# EAGLE board avoccado-nora2-panel (EAGLE 7.2.0), part 1 of 4
Avoccado-avr-yolandi Yolandi is the minified version of Avoccado-avr with less pins broken out and a footprint of less than one square inch for the PCB without peripherals.
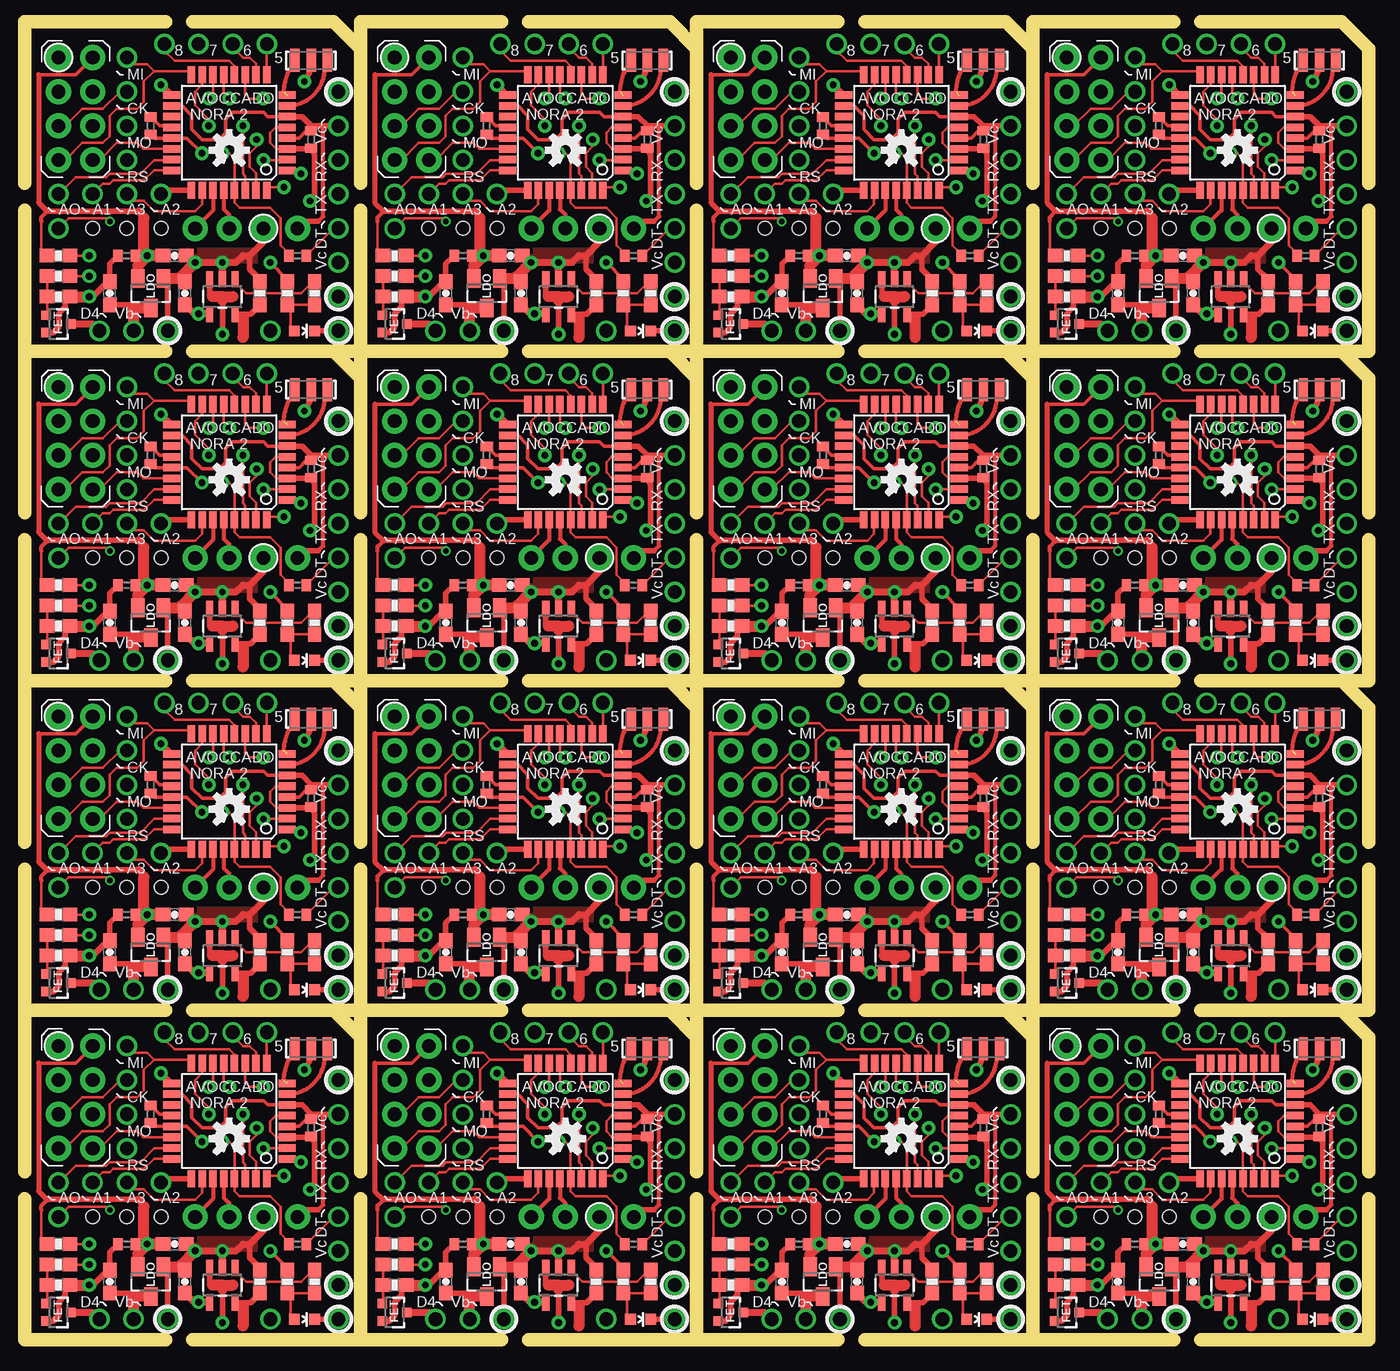
[diagram p0: board, top side]
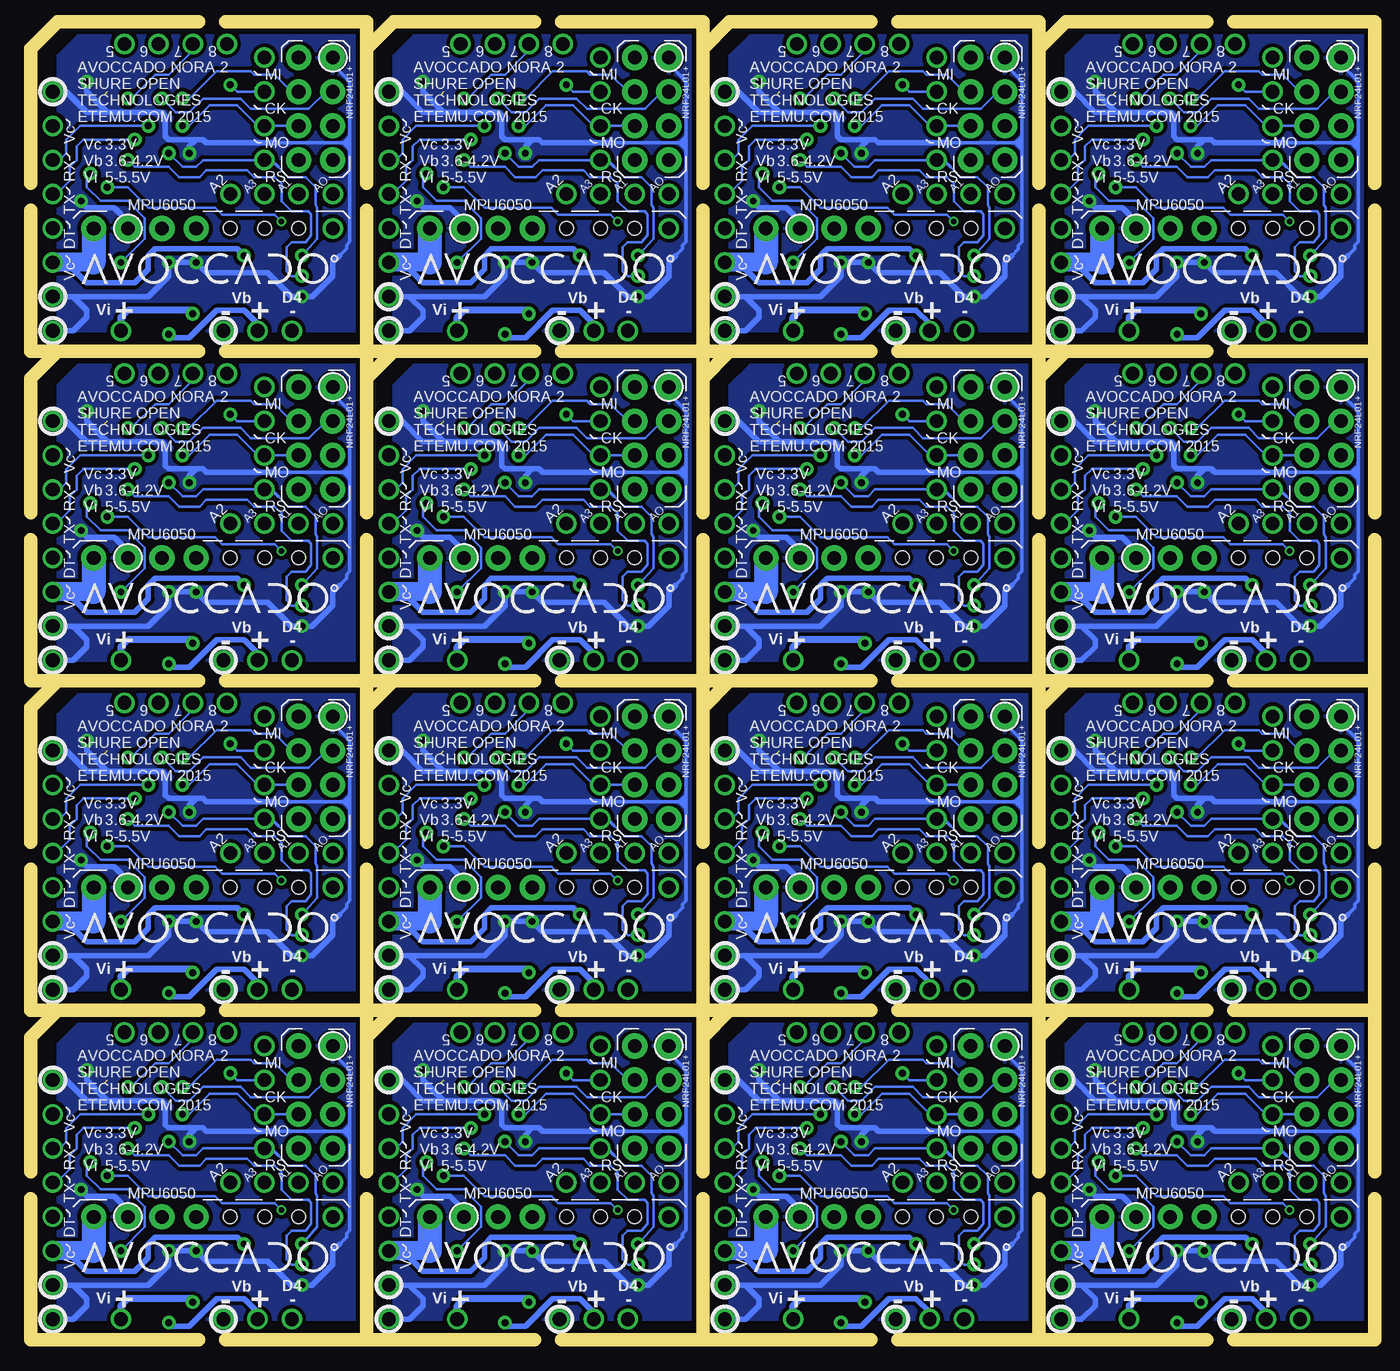
[diagram p1: board, bottom side, seen from below]

No outline drawn. Coordinates in mm, seen from the top.
Copper layers (1*16): Top 0.035mm / dielectric 1.5mm / Bottom 0.035mm
Design rules "dirt_cheap_dirty_boards.v1 *": minimum track width 5mil, minimum drill 12mil, track to track 5mil, track to pad 5mil, pad to pad 5mil, via to via 5mil, smd to smd 0mil, copper to edge 10mil, drill to drill 10mil, minimum pad ring 10mil, minimum via ring 6mil, stop-mask expansion 0mil, vias tented up to drill 25mil, thermal gap 10mil
Net classes: 1 vcc: width 0.254 mm; 3 usbvcc: width 0.203 mm, drill 0.61 mm, clearance 0.152 mm
Holes 1.02 mm at 4.57,8.64 7.11,8.64 9.65,8.64 29.57,8.64 32.11,8.64 34.65,8.64 4.57,33.14 7.11,33.14 9.65,33.14 29.57,33.14 32.11,33.14 34.65,33.14 54.57,8.64 57.11,8.64 59.65,8.64 79.57,8.64 82.11,8.64 84.65,8.64 54.57,33.14 57.11,33.14 59.65,33.14 79.57,33.14 82.11,33.14 84.65,33.14 4.57,57.64 7.11,57.64 9.65,57.64 29.57,57.64 32.11,57.64 34.65,57.64 4.57,82.14 7.11,82.14 9.65,82.14 29.57,82.14 32.11,82.14 34.65,82.14 54.57,57.64 57.11,57.64 59.65,57.64 79.57,57.64 82.11,57.64 84.65,57.64 54.57,82.14 57.11,82.14 59.65,82.14 79.57,82.14 82.11,82.14 84.65,82.14
Milling: 144 lines

## Footprints (pad centres in the part's own frame; a part is rotated, then mirrored left to right if it is on the bottom)
TQFP32-08 = smd 1.27 x 0.559: 1 -4.293,2.8; 2 -4.293,2; 3 -4.293,1.2; 4 -4.293,0.4; 5 -4.293,-0.4; 6 -4.293,-1.2; 7 -4.293,-2; 8 -4.293,-2.8; 17 4.293,-2.8; 18 4.293,-2; 19 4.293,-1.2; 20 4.293,-0.4; 21 4.293,0.4; 22 4.293,1.2; 23 4.293,2; 24 4.293,2.8 | smd 0.559 x 1.27: 9 -2.8,-4.293; 10 -2,-4.293; 11 -1.2,-4.293; 12 -0.4,-4.293; 13 0.4,-4.293; 14 1.2,-4.293; 15 2,-4.293; 16 2.8,-4.293; 25 2.8,4.293; 26 2,4.293; 27 1.2,4.293; 28 0.4,4.293; 29 -0.4,4.293; 30 -1.2,4.293; 31 -2,4.293; 32 -2.8,4.293
C0402 = smd 0.7 x 0.9: 1 -0.65,0; 2 0.65,0
0603-CAP = smd 1.1 x 1: 1 -0.85,0; 2 0.85,0
LED-0603 = smd 0.8 x 0.8: A 0,-0.75; C 0,0.75
1X01NS-KIT = drill 1.016 pad 1.524: 1 0,0
1X02_NO_SILK = drill 1.016 pad 1.88: 1 0,0; 2 2.54,0
SOT23 = smd 1 x 1.4: 1 -0.95,-1.1; 2 0.95,-1.1; 3 0,1.1
RESONATOR-SMD = smd 0.7 x 1.7: 1 -1.2,0; 2 0,0; 3 1.2,0
SOT323 = smd 0.7 x 0.7: 1 -0.65,-0.925; 2 0.65,-0.925; 3 0,0.925
0603-RES = smd 1.1 x 1: 1 -0.85,0; 2 0.85,0
SOT23-5 = smd 0.55 x 1.2: 1 -0.95,-1.3; 2 0,-1.3; 3 0.95,-1.3; 4 0.95,1.3; 5 -0.95,1.3

## Placement (x,y rotation side)
AVR  ATMEGA328P  [TQFP32-08]  14.73,15.76 180 top
AVR1  ATMEGA328P  [TQFP32-08]  39.73,15.76 180 top
AVR2  ATMEGA328P  [TQFP32-08]  14.73,40.26 180 top
AVR3  ATMEGA328P  [TQFP32-08]  39.73,40.26 180 top
AVR4  ATMEGA328P  [TQFP32-08]  64.73,15.76 180 top
AVR5  ATMEGA328P  [TQFP32-08]  89.73,15.76 180 top
AVR6  ATMEGA328P  [TQFP32-08]  64.73,40.26 180 top
AVR7  ATMEGA328P  [TQFP32-08]  89.73,40.26 180 top
AVR8  ATMEGA328P  [TQFP32-08]  14.73,64.76 180 top
AVR9  ATMEGA328P  [TQFP32-08]  39.73,64.76 180 top
AVR10  ATMEGA328P  [TQFP32-08]  14.73,89.26 180 top
AVR11  ATMEGA328P  [TQFP32-08]  39.73,89.26 180 top
AVR12  ATMEGA328P  [TQFP32-08]  64.73,64.76 180 top
AVR13  ATMEGA328P  [TQFP32-08]  89.73,64.76 180 top
AVR14  ATMEGA328P  [TQFP32-08]  64.73,89.26 180 top
AVR15  ATMEGA328P  [TQFP32-08]  89.73,89.26 180 top
C1  0.1uF  [C0402]  8.89,16.26 90 top
C2  0.1uF  [C0402]  19.81,6.61 0 top
C3  0.1uF  [C0402]  20.83,15.25 90 top
C4  4.7uF  [0603-CAP]  11.43,3.82 90 top
C5  4.7uF  [0603-CAP]  5.84,3.82 90 top
C6  4.7uF  [0603-CAP]  10.67,6.61 0 top
C7  0.1uF  [C0402]  32.11,6.61 180 top
C8  0.1uF  [C0402]  45.83,15.25 90 top
C9  0.1uF  [C0402]  33.89,16.26 90 top
C10  0.1uF  [C0402]  7.11,6.61 180 top
C11  4.7uF  [0603-CAP]  36.43,3.82 90 top
C12  0.1uF  [C0402]  44.81,6.61 0 top
C13  4.7uF  [0603-CAP]  30.84,3.82 90 top
C14  4.7uF  [0603-CAP]  35.67,6.61 0 top
C15  0.1uF  [C0402]  7.11,31.11 180 top
C16  0.1uF  [C0402]  20.83,39.75 90 top
C17  0.1uF  [C0402]  8.89,40.76 90 top
C18  4.7uF  [0603-CAP]  11.43,28.32 90 top
C19  0.1uF  [C0402]  19.81,31.11 0 top
C20  4.7uF  [0603-CAP]  5.84,28.32 90 top
C21  4.7uF  [0603-CAP]  10.67,31.11 0 top
C22  0.1uF  [C0402]  32.11,31.11 180 top
C23  0.1uF  [C0402]  45.83,39.75 90 top
C24  0.1uF  [C0402]  33.89,40.76 90 top
C25  4.7uF  [0603-CAP]  36.43,28.32 90 top
C26  0.1uF  [C0402]  44.81,31.11 0 top
C27  4.7uF  [0603-CAP]  30.84,28.32 90 top
C28  4.7uF  [0603-CAP]  35.67,31.11 0 top
C29  0.1uF  [C0402]  57.11,6.61 180 top
C30  0.1uF  [C0402]  70.83,15.25 90 top
C31  0.1uF  [C0402]  58.89,16.26 90 top
C32  4.7uF  [0603-CAP]  61.43,3.82 90 top
C33  0.1uF  [C0402]  69.81,6.61 0 top
C34  4.7uF  [0603-CAP]  55.84,3.82 90 top
C35  4.7uF  [0603-CAP]  60.67,6.61 0 top
C36  0.1uF  [C0402]  82.11,6.61 180 top
C37  0.1uF  [C0402]  95.83,15.25 90 top
C38  0.1uF  [C0402]  83.89,16.26 90 top
C39  4.7uF  [0603-CAP]  86.43,3.82 90 top
C40  0.1uF  [C0402]  94.81,6.61 0 top
C41  4.7uF  [0603-CAP]  80.84,3.82 90 top
C42  4.7uF  [0603-CAP]  85.67,6.61 0 top
C43  0.1uF  [C0402]  57.11,31.11 180 top
C44  0.1uF  [C0402]  70.83,39.75 90 top
C45  0.1uF  [C0402]  58.89,40.76 90 top
C46  4.7uF  [0603-CAP]  61.43,28.32 90 top
C47  0.1uF  [C0402]  69.81,31.11 0 top
C48  4.7uF  [0603-CAP]  55.84,28.32 90 top
C49  4.7uF  [0603-CAP]  60.67,31.11 0 top
C50  0.1uF  [C0402]  82.11,31.11 180 top
C51  0.1uF  [C0402]  95.83,39.75 90 top
C52  0.1uF  [C0402]  83.89,40.76 90 top
C53  4.7uF  [0603-CAP]  86.43,28.32 90 top
C54  0.1uF  [C0402]  94.81,31.11 0 top
C55  4.7uF  [0603-CAP]  80.84,28.32 90 top
C56  4.7uF  [0603-CAP]  85.67,31.11 0 top
C57  0.1uF  [C0402]  7.11,55.61 180 top
C58  0.1uF  [C0402]  20.83,64.25 90 top
C59  0.1uF  [C0402]  8.89,65.26 90 top
C60  4.7uF  [0603-CAP]  11.43,52.82 90 top
C61  0.1uF  [C0402]  19.81,55.61 0 top
C62  4.7uF  [0603-CAP]  5.84,52.82 90 top
C63  4.7uF  [0603-CAP]  10.67,55.61 0 top
C64  0.1uF  [C0402]  32.11,55.61 180 top
C65  0.1uF  [C0402]  45.83,64.25 90 top
C66  0.1uF  [C0402]  33.89,65.26 90 top
C67  4.7uF  [0603-CAP]  36.43,52.82 90 top
C68  0.1uF  [C0402]  44.81,55.61 0 top
C69  4.7uF  [0603-CAP]  30.84,52.82 90 top
C70  4.7uF  [0603-CAP]  35.67,55.61 0 top
C71  0.1uF  [C0402]  7.11,80.11 180 top
C72  0.1uF  [C0402]  20.83,88.75 90 top
C73  0.1uF  [C0402]  8.89,89.76 90 top
C74  4.7uF  [0603-CAP]  11.43,77.32 90 top
C75  0.1uF  [C0402]  19.81,80.11 0 top
C76  4.7uF  [0603-CAP]  5.84,77.32 90 top
C77  4.7uF  [0603-CAP]  10.67,80.11 0 top
C78  0.1uF  [C0402]  32.11,80.11 180 top
C79  0.1uF  [C0402]  45.83,88.75 90 top
C80  0.1uF  [C0402]  33.89,89.76 90 top
C81  4.7uF  [0603-CAP]  36.43,77.32 90 top
C82  0.1uF  [C0402]  44.81,80.11 0 top
C83  4.7uF  [0603-CAP]  30.84,77.32 90 top
C84  4.7uF  [0603-CAP]  35.67,80.11 0 top
C85  0.1uF  [C0402]  57.11,55.61 180 top
C86  0.1uF  [C0402]  70.83,64.25 90 top
C87  0.1uF  [C0402]  58.89,65.26 90 top
C88  4.7uF  [0603-CAP]  61.43,52.82 90 top
C89  0.1uF  [C0402]  69.81,55.61 0 top
C90  4.7uF  [0603-CAP]  55.84,52.82 90 top
C91  4.7uF  [0603-CAP]  60.67,55.61 0 top
C92  0.1uF  [C0402]  82.11,55.61 180 top
C93  0.1uF  [C0402]  95.83,64.25 90 top
C94  0.1uF  [C0402]  83.89,65.26 90 top
C95  4.7uF  [0603-CAP]  86.43,52.82 90 top
C96  0.1uF  [C0402]  94.81,55.61 0 top
C97  4.7uF  [0603-CAP]  80.84,52.82 90 top
C98  4.7uF  [0603-CAP]  85.67,55.61 0 top
C99  0.1uF  [C0402]  57.11,80.11 180 top
C100  0.1uF  [C0402]  70.83,88.75 90 top
C101  0.1uF  [C0402]  58.89,89.76 90 top
C102  4.7uF  [0603-CAP]  61.43,77.32 90 top
C103  0.1uF  [C0402]  69.81,80.11 0 top
C104  4.7uF  [0603-CAP]  55.84,77.32 90 top
C105  4.7uF  [0603-CAP]  60.67,80.11 0 top
C106  0.1uF  [C0402]  82.11,80.11 180 top
C107  0.1uF  [C0402]  95.83,88.75 90 top
C108  0.1uF  [C0402]  83.89,89.76 90 top
C109  4.7uF  [0603-CAP]  86.43,77.32 90 top
C110  0.1uF  [C0402]  94.81,80.11 0 top
C111  4.7uF  [0603-CAP]  80.84,77.32 90 top
C112  4.7uF  [0603-CAP]  85.67,80.11 0 top
D1  LED  [LED-0603]  20.33,1.02 270 top
D2  LED  [LED-0603]  45.33,1.02 270 top
D3  LED  [LED-0603]  20.33,25.52 270 top
D4  LED  [LED-0603]  45.33,25.52 270 top
D5  LED  [LED-0603]  70.33,1.02 270 top
D6  LED  [LED-0603]  95.33,1.02 270 top
D7  LED  [LED-0603]  70.33,25.52 270 top
D8  LED  [LED-0603]  95.33,25.52 270 top
D9  LED  [LED-0603]  20.33,50.02 270 top
D10  LED  [LED-0603]  45.33,50.02 270 top
D11  LED  [LED-0603]  20.33,74.52 270 top
D12  LED  [LED-0603]  45.33,74.52 270 top
D13  LED  [LED-0603]  70.33,50.02 270 top
D14  LED  [LED-0603]  95.33,50.02 270 top
D15  LED  [LED-0603]  70.33,74.52 270 top
D16  LED  [LED-0603]  95.33,74.52 270 top
JP1  M01NOSILK-KIT  [1X01NS-KIT]  47.86,3.56 0 top
JP2  M021X02_NO_SILK  [1X02_NO_SILK]  2.03,21.34 0 top
JP3  M01NOSILK-KIT  [1X01NS-KIT]  22.86,18.8 0 top
JP4  M021X02_NO_SILK  [1X02_NO_SILK]  19.81,8.64 180 top
JP5  M021X02_NO_SILK  [1X02_NO_SILK]  14.73,8.64 180 top
JP6  M01NOSILK-KIT  [1X01NS-KIT]  22.86,3.56 0 top
JP7  M01NOSILK-KIT  [1X01NS-KIT]  47.86,13.72 0 top
JP8  M01NOSILK-KIT  [1X01NS-KIT]  22.86,13.72 0 top
JP9  M01NOSILK-KIT  [1X01NS-KIT]  22.86,11.18 0 top
JP10  M01NOSILK-KIT  [1X01NS-KIT]  22.86,8.64 0 top
JP11  M01NOSILK-KIT  [1X01NS-KIT]  22.86,16.26 0 top
JP12  M01NOSILK-KIT  [1X01NS-KIT]  7.11,21.34 0 top
JP13  M01NOSILK-KIT  [1X01NS-KIT]  7.11,18.8 0 top
JP14  M01NOSILK-KIT  [1X01NS-KIT]  7.11,16.26 0 top
JP15  M01NOSILK-KIT  [1X01NS-KIT]  7.11,13.72 0 top
JP16  M01NOSILK-KIT  [1X01NS-KIT]  47.86,11.18 0 top
JP17  M01NOSILK-KIT  [1X01NS-KIT]  17.78,1.02 0 top
JP18  M01NOSILK-KIT  [1X01NS-KIT]  22.86,6.1 0 top
JP19  M01NOSILK-KIT  [1X01NS-KIT]  2.03,11.18 90 top
JP20  M01NOSILK-KIT  [1X01NS-KIT]  4.57,11.18 90 top
JP21  M01NOSILK-KIT  [1X01NS-KIT]  9.65,11.18 90 top
JP22  M01NOSILK-KIT  [1X01NS-KIT]  7.11,11.18 90 top
JP23  M01NOSILK-KIT  [1X01NS-KIT]  5.08,1.02 0 top
JP24  M01NOSILK-KIT  [1X01NS-KIT]  7.62,1.02 0 top
JP25  M01NOSILK-KIT  [1X01NS-KIT]  10.16,1.02 0 top
JP26  M01NOSILK-KIT  [1X01NS-KIT]  22.86,1.02 0 top
JP27  M021X02_NO_SILK  [1X02_NO_SILK]  2.03,18.8 0 top
JP28  M021X02_NO_SILK  [1X02_NO_SILK]  2.03,16.26 0 top
JP29  M021X02_NO_SILK  [1X02_NO_SILK]  2.03,13.72 0 top
JP30  M01NOSILK-KIT  [1X01NS-KIT]  47.86,8.64 0 top
JP31  M01NOSILK-KIT  [1X01NS-KIT]  47.86,16.26 0 top
JP32  M01NOSILK-KIT  [1X01NS-KIT]  32.11,21.34 0 top
JP33  M01NOSILK-KIT  [1X01NS-KIT]  32.11,18.8 0 top
JP34  M01NOSILK-KIT  [1X01NS-KIT]  32.11,16.26 0 top
JP35  M01NOSILK-KIT  [1X01NS-KIT]  32.11,13.72 0 top
JP36  M01NOSILK-KIT  [1X01NS-KIT]  47.86,18.8 0 top
JP37  M01NOSILK-KIT  [1X01NS-KIT]  42.78,1.02 0 top
JP38  M01NOSILK-KIT  [1X01NS-KIT]  47.86,6.1 0 top
JP39  M01NOSILK-KIT  [1X01NS-KIT]  27.03,11.18 90 top
JP40  M01NOSILK-KIT  [1X01NS-KIT]  29.57,11.18 90 top
JP41  M01NOSILK-KIT  [1X01NS-KIT]  34.65,11.18 90 top
JP42  M01NOSILK-KIT  [1X01NS-KIT]  32.11,11.18 90 top
JP43  M01NOSILK-KIT  [1X01NS-KIT]  32.62,1.02 0 top
JP44  M01NOSILK-KIT  [1X01NS-KIT]  30.08,1.02 0 top
JP45  M01NOSILK-KIT  [1X01NS-KIT]  35.16,1.02 0 top
JP46  M01NOSILK-KIT  [1X01NS-KIT]  47.86,1.02 0 top
JP47  M021X02_NO_SILK  [1X02_NO_SILK]  27.03,21.34 0 top
JP48  M021X02_NO_SILK  [1X02_NO_SILK]  27.03,18.8 0 top
JP49  M021X02_NO_SILK  [1X02_NO_SILK]  27.03,16.26 0 top
JP50  M021X02_NO_SILK  [1X02_NO_SILK]  27.03,13.72 0 top
JP51  M021X02_NO_SILK  [1X02_NO_SILK]  44.81,8.64 180 top
JP52  M021X02_NO_SILK  [1X02_NO_SILK]  39.73,8.64 180 top
JP53  M01NOSILK-KIT  [1X01NS-KIT]  22.86,28.06 0 top
JP54  M01NOSILK-KIT  [1X01NS-KIT]  22.86,38.22 0 top
JP55  M01NOSILK-KIT  [1X01NS-KIT]  22.86,35.68 0 top
JP56  M01NOSILK-KIT  [1X01NS-KIT]  22.86,33.14 0 top
JP57  M01NOSILK-KIT  [1X01NS-KIT]  22.86,40.76 0 top
JP58  M01NOSILK-KIT  [1X01NS-KIT]  7.11,45.84 0 top
JP59  M01NOSILK-KIT  [1X01NS-KIT]  7.11,43.3 0 top
JP60  M01NOSILK-KIT  [1X01NS-KIT]  7.11,40.76 0 top
JP61  M01NOSILK-KIT  [1X01NS-KIT]  7.11,38.22 0 top
JP62  M01NOSILK-KIT  [1X01NS-KIT]  22.86,43.3 0 top
JP63  M01NOSILK-KIT  [1X01NS-KIT]  17.78,25.52 0 top
JP64  M01NOSILK-KIT  [1X01NS-KIT]  22.86,30.6 0 top
JP65  M01NOSILK-KIT  [1X01NS-KIT]  2.03,35.68 90 top
JP66  M01NOSILK-KIT  [1X01NS-KIT]  4.57,35.68 90 top
JP67  M01NOSILK-KIT  [1X01NS-KIT]  9.65,35.68 90 top
JP68  M01NOSILK-KIT  [1X01NS-KIT]  7.11,35.68 90 top
JP69  M01NOSILK-KIT  [1X01NS-KIT]  7.62,25.52 0 top
JP70  M01NOSILK-KIT  [1X01NS-KIT]  5.08,25.52 0 top
JP71  M01NOSILK-KIT  [1X01NS-KIT]  10.16,25.52 0 top
JP72  M01NOSILK-KIT  [1X01NS-KIT]  22.86,25.52 0 top
JP73  M021X02_NO_SILK  [1X02_NO_SILK]  2.03,45.84 0 top
JP74  M021X02_NO_SILK  [1X02_NO_SILK]  2.03,43.3 0 top
JP75  M021X02_NO_SILK  [1X02_NO_SILK]  2.03,40.76 0 top
JP76  M021X02_NO_SILK  [1X02_NO_SILK]  2.03,38.22 0 top
JP77  M021X02_NO_SILK  [1X02_NO_SILK]  19.81,33.14 180 top
JP78  M021X02_NO_SILK  [1X02_NO_SILK]  14.73,33.14 180 top
JP79  M01NOSILK-KIT  [1X01NS-KIT]  47.86,28.06 0 top
JP80  M01NOSILK-KIT  [1X01NS-KIT]  47.86,38.22 0 top
JP81  M01NOSILK-KIT  [1X01NS-KIT]  47.86,35.68 0 top
JP82  M01NOSILK-KIT  [1X01NS-KIT]  47.86,33.14 0 top
JP83  M01NOSILK-KIT  [1X01NS-KIT]  47.86,40.76 0 top
JP84  M01NOSILK-KIT  [1X01NS-KIT]  32.11,45.84 0 top
JP85  M01NOSILK-KIT  [1X01NS-KIT]  32.11,43.3 0 top
JP86  M01NOSILK-KIT  [1X01NS-KIT]  32.11,40.76 0 top
JP87  M01NOSILK-KIT  [1X01NS-KIT]  32.11,38.22 0 top
JP88  M01NOSILK-KIT  [1X01NS-KIT]  47.86,43.3 0 top
JP89  M01NOSILK-KIT  [1X01NS-KIT]  42.78,25.52 0 top
JP90  M01NOSILK-KIT  [1X01NS-KIT]  47.86,30.6 0 top
JP91  M01NOSILK-KIT  [1X01NS-KIT]  27.03,35.68 90 top
JP92  M01NOSILK-KIT  [1X01NS-KIT]  29.57,35.68 90 top
JP93  M01NOSILK-KIT  [1X01NS-KIT]  34.65,35.68 90 top
JP94  M01NOSILK-KIT  [1X01NS-KIT]  32.11,35.68 90 top
JP95  M01NOSILK-KIT  [1X01NS-KIT]  32.62,25.52 0 top
JP96  M01NOSILK-KIT  [1X01NS-KIT]  30.08,25.52 0 top
JP97  M01NOSILK-KIT  [1X01NS-KIT]  35.16,25.52 0 top
JP98  M01NOSILK-KIT  [1X01NS-KIT]  47.86,25.52 0 top
JP99  M021X02_NO_SILK  [1X02_NO_SILK]  27.03,45.84 0 top
JP100  M021X02_NO_SILK  [1X02_NO_SILK]  27.03,43.3 0 top
JP101  M021X02_NO_SILK  [1X02_NO_SILK]  27.03,40.76 0 top
JP102  M021X02_NO_SILK  [1X02_NO_SILK]  27.03,38.22 0 top
JP103  M021X02_NO_SILK  [1X02_NO_SILK]  44.81,33.14 180 top
JP104  M021X02_NO_SILK  [1X02_NO_SILK]  39.73,33.14 180 top
JP105  M01NOSILK-KIT  [1X01NS-KIT]  72.86,3.56 0 top
JP106  M01NOSILK-KIT  [1X01NS-KIT]  72.86,13.72 0 top
JP107  M01NOSILK-KIT  [1X01NS-KIT]  72.86,11.18 0 top
JP108  M01NOSILK-KIT  [1X01NS-KIT]  72.86,8.64 0 top
JP109  M01NOSILK-KIT  [1X01NS-KIT]  72.86,16.26 0 top
JP110  M01NOSILK-KIT  [1X01NS-KIT]  57.11,21.34 0 top
JP111  M01NOSILK-KIT  [1X01NS-KIT]  57.11,18.8 0 top
JP112  M01NOSILK-KIT  [1X01NS-KIT]  57.11,16.26 0 top
JP113  M01NOSILK-KIT  [1X01NS-KIT]  57.11,13.72 0 top
JP114  M01NOSILK-KIT  [1X01NS-KIT]  72.86,18.8 0 top
JP115  M01NOSILK-KIT  [1X01NS-KIT]  67.78,1.02 0 top
JP116  M01NOSILK-KIT  [1X01NS-KIT]  72.86,6.1 0 top
JP117  M01NOSILK-KIT  [1X01NS-KIT]  52.03,11.18 90 top
JP118  M01NOSILK-KIT  [1X01NS-KIT]  54.57,11.18 90 top
JP119  M01NOSILK-KIT  [1X01NS-KIT]  59.65,11.18 90 top
JP120  M01NOSILK-KIT  [1X01NS-KIT]  57.11,11.18 90 top
JP121  M01NOSILK-KIT  [1X01NS-KIT]  57.62,1.02 0 top
JP122  M01NOSILK-KIT  [1X01NS-KIT]  55.08,1.02 0 top
JP123  M01NOSILK-KIT  [1X01NS-KIT]  60.16,1.02 0 top
JP124  M01NOSILK-KIT  [1X01NS-KIT]  72.86,1.02 0 top
JP125  M021X02_NO_SILK  [1X02_NO_SILK]  52.03,21.34 0 top
JP126  M021X02_NO_SILK  [1X02_NO_SILK]  52.03,18.8 0 top
JP127  M021X02_NO_SILK  [1X02_NO_SILK]  52.03,16.26 0 top
JP128  M021X02_NO_SILK  [1X02_NO_SILK]  52.03,13.72 0 top
JP129  M021X02_NO_SILK  [1X02_NO_SILK]  69.81,8.64 180 top
JP130  M021X02_NO_SILK  [1X02_NO_SILK]  64.73,8.64 180 top
JP131  M01NOSILK-KIT  [1X01NS-KIT]  97.86,3.56 0 top
JP132  M01NOSILK-KIT  [1X01NS-KIT]  97.86,13.72 0 top
JP133  M01NOSILK-KIT  [1X01NS-KIT]  97.86,11.18 0 top
JP134  M01NOSILK-KIT  [1X01NS-KIT]  97.86,8.64 0 top
JP135  M01NOSILK-KIT  [1X01NS-KIT]  97.86,16.26 0 top
JP136  M01NOSILK-KIT  [1X01NS-KIT]  82.11,21.34 0 top
JP137  M01NOSILK-KIT  [1X01NS-KIT]  82.11,18.8 0 top
JP138  M01NOSILK-KIT  [1X01NS-KIT]  82.11,16.26 0 top
JP139  M01NOSILK-KIT  [1X01NS-KIT]  82.11,13.72 0 top
JP140  M01NOSILK-KIT  [1X01NS-KIT]  97.86,18.8 0 top
JP141  M01NOSILK-KIT  [1X01NS-KIT]  92.78,1.02 0 top
JP142  M01NOSILK-KIT  [1X01NS-KIT]  97.86,6.1 0 top
JP143  M01NOSILK-KIT  [1X01NS-KIT]  77.03,11.18 90 top
JP144  M01NOSILK-KIT  [1X01NS-KIT]  79.57,11.18 90 top
JP145  M01NOSILK-KIT  [1X01NS-KIT]  84.65,11.18 90 top
JP146  M01NOSILK-KIT  [1X01NS-KIT]  82.11,11.18 90 top
JP147  M01NOSILK-KIT  [1X01NS-KIT]  82.62,1.02 0 top
JP148  M01NOSILK-KIT  [1X01NS-KIT]  80.08,1.02 0 top
JP149  M01NOSILK-KIT  [1X01NS-KIT]  85.16,1.02 0 top
JP150  M01NOSILK-KIT  [1X01NS-KIT]  97.86,1.02 0 top
JP151  M021X02_NO_SILK  [1X02_NO_SILK]  77.03,21.34 0 top
JP152  M021X02_NO_SILK  [1X02_NO_SILK]  77.03,18.8 0 top
JP153  M021X02_NO_SILK  [1X02_NO_SILK]  77.03,16.26 0 top
JP154  M021X02_NO_SILK  [1X02_NO_SILK]  77.03,13.72 0 top
JP155  M021X02_NO_SILK  [1X02_NO_SILK]  94.81,8.64 180 top
JP156  M021X02_NO_SILK  [1X02_NO_SILK]  89.73,8.64 180 top
JP157  M01NOSILK-KIT  [1X01NS-KIT]  72.86,28.06 0 top
JP158  M01NOSILK-KIT  [1X01NS-KIT]  72.86,38.22 0 top
JP159  M01NOSILK-KIT  [1X01NS-KIT]  72.86,35.68 0 top
JP160  M01NOSILK-KIT  [1X01NS-KIT]  72.86,33.14 0 top
JP161  M01NOSILK-KIT  [1X01NS-KIT]  72.86,40.76 0 top
JP162  M01NOSILK-KIT  [1X01NS-KIT]  57.11,45.84 0 top
JP163  M01NOSILK-KIT  [1X01NS-KIT]  57.11,43.3 0 top
JP164  M01NOSILK-KIT  [1X01NS-KIT]  57.11,40.76 0 top
JP165  M01NOSILK-KIT  [1X01NS-KIT]  57.11,38.22 0 top
JP166  M01NOSILK-KIT  [1X01NS-KIT]  72.86,43.3 0 top
JP167  M01NOSILK-KIT  [1X01NS-KIT]  67.78,25.52 0 top
JP168  M01NOSILK-KIT  [1X01NS-KIT]  72.86,30.6 0 top
JP169  M01NOSILK-KIT  [1X01NS-KIT]  52.03,35.68 90 top
JP170  M01NOSILK-KIT  [1X01NS-KIT]  54.57,35.68 90 top
JP171  M01NOSILK-KIT  [1X01NS-KIT]  59.65,35.68 90 top
JP172  M01NOSILK-KIT  [1X01NS-KIT]  57.11,35.68 90 top
JP173  M01NOSILK-KIT  [1X01NS-KIT]  57.62,25.52 0 top
JP174  M01NOSILK-KIT  [1X01NS-KIT]  55.08,25.52 0 top
JP175  M01NOSILK-KIT  [1X01NS-KIT]  60.16,25.52 0 top
JP176  M01NOSILK-KIT  [1X01NS-KIT]  72.86,25.52 0 top
JP177  M021X02_NO_SILK  [1X02_NO_SILK]  52.03,45.84 0 top
JP178  M021X02_NO_SILK  [1X02_NO_SILK]  52.03,43.3 0 top
JP179  M021X02_NO_SILK  [1X02_NO_SILK]  52.03,40.76 0 top
JP180  M021X02_NO_SILK  [1X02_NO_SILK]  52.03,38.22 0 top
JP181  M021X02_NO_SILK  [1X02_NO_SILK]  69.81,33.14 180 top
JP182  M021X02_NO_SILK  [1X02_NO_SILK]  64.73,33.14 180 top
JP183  M01NOSILK-KIT  [1X01NS-KIT]  97.86,28.06 0 top
JP184  M01NOSILK-KIT  [1X01NS-KIT]  97.86,38.22 0 top
JP185  M01NOSILK-KIT  [1X01NS-KIT]  97.86,35.68 0 top
JP186  M01NOSILK-KIT  [1X01NS-KIT]  97.86,33.14 0 top
JP187  M01NOSILK-KIT  [1X01NS-KIT]  97.86,40.76 0 top
JP188  M01NOSILK-KIT  [1X01NS-KIT]  82.11,45.84 0 top
JP189  M01NOSILK-KIT  [1X01NS-KIT]  82.11,43.3 0 top
JP190  M01NOSILK-KIT  [1X01NS-KIT]  82.11,40.76 0 top
JP191  M01NOSILK-KIT  [1X01NS-KIT]  82.11,38.22 0 top
JP192  M01NOSILK-KIT  [1X01NS-KIT]  97.86,43.3 0 top
JP193  M01NOSILK-KIT  [1X01NS-KIT]  92.78,25.52 0 top
JP194  M01NOSILK-KIT  [1X01NS-KIT]  97.86,30.6 0 top
JP195  M01NOSILK-KIT  [1X01NS-KIT]  77.03,35.68 90 top
JP196  M01NOSILK-KIT  [1X01NS-KIT]  79.57,35.68 90 top
JP197  M01NOSILK-KIT  [1X01NS-KIT]  84.65,35.68 90 top
JP198  M01NOSILK-KIT  [1X01NS-KIT]  82.11,35.68 90 top
JP199  M01NOSILK-KIT  [1X01NS-KIT]  82.62,25.52 0 top
JP200  M01NOSILK-KIT  [1X01NS-KIT]  80.08,25.52 0 top
JP201  M01NOSILK-KIT  [1X01NS-KIT]  85.16,25.52 0 top
JP202  M01NOSILK-KIT  [1X01NS-KIT]  97.86,25.52 0 top
JP203  M021X02_NO_SILK  [1X02_NO_SILK]  77.03,45.84 0 top
JP204  M021X02_NO_SILK  [1X02_NO_SILK]  77.03,43.3 0 top
JP205  M021X02_NO_SILK  [1X02_NO_SILK]  77.03,40.76 0 top
JP206  M021X02_NO_SILK  [1X02_NO_SILK]  77.03,38.22 0 top
JP207  M021X02_NO_SILK  [1X02_NO_SILK]  94.81,33.14 180 top
JP208  M021X02_NO_SILK  [1X02_NO_SILK]  89.73,33.14 180 top
JP209  M01NOSILK-KIT  [1X01NS-KIT]  22.86,52.56 0 top
JP210  M01NOSILK-KIT  [1X01NS-KIT]  22.86,62.72 0 top
JP211  M01NOSILK-KIT  [1X01NS-KIT]  22.86,60.18 0 top
JP212  M01NOSILK-KIT  [1X01NS-KIT]  22.86,57.64 0 top
JP213  M01NOSILK-KIT  [1X01NS-KIT]  22.86,65.26 0 top
JP214  M01NOSILK-KIT  [1X01NS-KIT]  7.11,70.34 0 top
JP215  M01NOSILK-KIT  [1X01NS-KIT]  7.11,67.8 0 top
JP216  M01NOSILK-KIT  [1X01NS-KIT]  7.11,65.26 0 top
JP217  M01NOSILK-KIT  [1X01NS-KIT]  7.11,62.72 0 top
JP218  M01NOSILK-KIT  [1X01NS-KIT]  22.86,67.8 0 top
JP219  M01NOSILK-KIT  [1X01NS-KIT]  17.78,50.02 0 top
JP220  M01NOSILK-KIT  [1X01NS-KIT]  22.86,55.1 0 top
JP221  M01NOSILK-KIT  [1X01NS-KIT]  2.03,60.18 90 top
JP222  M01NOSILK-KIT  [1X01NS-KIT]  4.57,60.18 90 top
JP223  M01NOSILK-KIT  [1X01NS-KIT]  9.65,60.18 90 top
JP224  M01NOSILK-KIT  [1X01NS-KIT]  7.11,60.18 90 top
JP225  M01NOSILK-KIT  [1X01NS-KIT]  7.62,50.02 0 top
JP226  M01NOSILK-KIT  [1X01NS-KIT]  5.08,50.02 0 top
JP227  M01NOSILK-KIT  [1X01NS-KIT]  10.16,50.02 0 top
JP228  M01NOSILK-KIT  [1X01NS-KIT]  22.86,50.02 0 top
JP229  M021X02_NO_SILK  [1X02_NO_SILK]  2.03,70.34 0 top
JP230  M021X02_NO_SILK  [1X02_NO_SILK]  2.03,67.8 0 top
JP231  M021X02_NO_SILK  [1X02_NO_SILK]  2.03,65.26 0 top
JP232  M021X02_NO_SILK  [1X02_NO_SILK]  2.03,62.72 0 top
JP233  M021X02_NO_SILK  [1X02_NO_SILK]  19.81,57.64 180 top
JP234  M021X02_NO_SILK  [1X02_NO_SILK]  14.73,57.64 180 top
JP235  M01NOSILK-KIT  [1X01NS-KIT]  47.86,52.56 0 top
JP236  M01NOSILK-KIT  [1X01NS-KIT]  47.86,62.72 0 top
JP237  M01NOSILK-KIT  [1X01NS-KIT]  47.86,60.18 0 top
JP238  M01NOSILK-KIT  [1X01NS-KIT]  47.86,57.64 0 top
JP239  M01NOSILK-KIT  [1X01NS-KIT]  47.86,65.26 0 top
JP240  M01NOSILK-KIT  [1X01NS-KIT]  32.11,70.34 0 top
JP241  M01NOSILK-KIT  [1X01NS-KIT]  32.11,67.8 0 top
JP242  M01NOSILK-KIT  [1X01NS-KIT]  32.11,65.26 0 top
JP243  M01NOSILK-KIT  [1X01NS-KIT]  32.11,62.72 0 top
JP244  M01NOSILK-KIT  [1X01NS-KIT]  47.86,67.8 0 top
JP245  M01NOSILK-KIT  [1X01NS-KIT]  42.78,50.02 0 top
JP246  M01NOSILK-KIT  [1X01NS-KIT]  47.86,55.1 0 top
JP247  M01NOSILK-KIT  [1X01NS-KIT]  27.03,60.18 90 top
JP248  M01NOSILK-KIT  [1X01NS-KIT]  29.57,60.18 90 top
JP249  M01NOSILK-KIT  [1X01NS-KIT]  34.65,60.18 90 top
JP250  M01NOSILK-KIT  [1X01NS-KIT]  32.11,60.18 90 top
JP251  M01NOSILK-KIT  [1X01NS-KIT]  32.62,50.02 0 top
JP252  M01NOSILK-KIT  [1X01NS-KIT]  30.08,50.02 0 top
JP253  M01NOSILK-KIT  [1X01NS-KIT]  35.16,50.02 0 top
JP254  M01NOSILK-KIT  [1X01NS-KIT]  47.86,50.02 0 top
JP255  M021X02_NO_SILK  [1X02_NO_SILK]  27.03,70.34 0 top
JP256  M021X02_NO_SILK  [1X02_NO_SILK]  27.03,67.8 0 top
JP257  M021X02_NO_SILK  [1X02_NO_SILK]  27.03,65.26 0 top
JP258  M021X02_NO_SILK  [1X02_NO_SILK]  27.03,62.72 0 top
JP259  M021X02_NO_SILK  [1X02_NO_SILK]  44.81,57.64 180 top
JP260  M021X02_NO_SILK  [1X02_NO_SILK]  39.73,57.64 180 top
JP261  M01NOSILK-KIT  [1X01NS-KIT]  22.86,77.06 0 top
JP262  M01NOSILK-KIT  [1X01NS-KIT]  22.86,87.22 0 top
JP263  M01NOSILK-KIT  [1X01NS-KIT]  22.86,84.68 0 top
JP264  M01NOSILK-KIT  [1X01NS-KIT]  22.86,82.14 0 top
JP265  M01NOSILK-KIT  [1X01NS-KIT]  22.86,89.76 0 top
JP266  M01NOSILK-KIT  [1X01NS-KIT]  7.11,94.84 0 top
JP267  M01NOSILK-KIT  [1X01NS-KIT]  7.11,92.3 0 top
JP268  M01NOSILK-KIT  [1X01NS-KIT]  7.11,89.76 0 top
JP269  M01NOSILK-KIT  [1X01NS-KIT]  7.11,87.22 0 top
JP270  M01NOSILK-KIT  [1X01NS-KIT]  22.86,92.3 0 top
JP271  M01NOSILK-KIT  [1X01NS-KIT]  17.78,74.52 0 top
JP272  M01NOSILK-KIT  [1X01NS-KIT]  22.86,79.6 0 top
JP273  M01NOSILK-KIT  [1X01NS-KIT]  2.03,84.68 90 top
JP274  M01NOSILK-KIT  [1X01NS-KIT]  4.57,84.68 90 top
JP275  M01NOSILK-KIT  [1X01NS-KIT]  9.65,84.68 90 top
JP276  M01NOSILK-KIT  [1X01NS-KIT]  7.11,84.68 90 top
JP277  M01NOSILK-KIT  [1X01NS-KIT]  7.62,74.52 0 top
JP278  M01NOSILK-KIT  [1X01NS-KIT]  5.08,74.52 0 top
JP279  M01NOSILK-KIT  [1X01NS-KIT]  10.16,74.52 0 top
JP280  M01NOSILK-KIT  [1X01NS-KIT]  22.86,74.52 0 top
JP281  M021X02_NO_SILK  [1X02_NO_SILK]  2.03,94.84 0 top
JP282  M021X02_NO_SILK  [1X02_NO_SILK]  2.03,92.3 0 top
JP283  M021X02_NO_SILK  [1X02_NO_SILK]  2.03,89.76 0 top
JP284  M021X02_NO_SILK  [1X02_NO_SILK]  2.03,87.22 0 top
JP285  M021X02_NO_SILK  [1X02_NO_SILK]  19.81,82.14 180 top
JP286  M021X02_NO_SILK  [1X02_NO_SILK]  14.73,82.14 180 top
JP287  M01NOSILK-KIT  [1X01NS-KIT]  47.86,77.06 0 top
JP288  M01NOSILK-KIT  [1X01NS-KIT]  47.86,87.22 0 top
JP289  M01NOSILK-KIT  [1X01NS-KIT]  47.86,84.68 0 top
JP290  M01NOSILK-KIT  [1X01NS-KIT]  47.86,82.14 0 top
JP291  M01NOSILK-KIT  [1X01NS-KIT]  47.86,89.76 0 top
JP292  M01NOSILK-KIT  [1X01NS-KIT]  32.11,94.84 0 top
JP293  M01NOSILK-KIT  [1X01NS-KIT]  32.11,92.3 0 top
JP294  M01NOSILK-KIT  [1X01NS-KIT]  32.11,89.76 0 top
JP295  M01NOSILK-KIT  [1X01NS-KIT]  32.11,87.22 0 top
JP296  M01NOSILK-KIT  [1X01NS-KIT]  47.86,92.3 0 top
JP297  M01NOSILK-KIT  [1X01NS-KIT]  42.78,74.52 0 top
JP298  M01NOSILK-KIT  [1X01NS-KIT]  47.86,79.6 0 top
JP299  M01NOSILK-KIT  [1X01NS-KIT]  27.03,84.68 90 top
JP300  M01NOSILK-KIT  [1X01NS-KIT]  29.57,84.68 90 top
JP301  M01NOSILK-KIT  [1X01NS-KIT]  34.65,84.68 90 top
JP302  M01NOSILK-KIT  [1X01NS-KIT]  32.11,84.68 90 top
JP303  M01NOSILK-KIT  [1X01NS-KIT]  32.62,74.52 0 top
JP304  M01NOSILK-KIT  [1X01NS-KIT]  30.08,74.52 0 top
JP305  M01NOSILK-KIT  [1X01NS-KIT]  35.16,74.52 0 top
JP306  M01NOSILK-KIT  [1X01NS-KIT]  47.86,74.52 0 top
JP307  M021X02_NO_SILK  [1X02_NO_SILK]  27.03,94.84 0 top
JP308  M021X02_NO_SILK  [1X02_NO_SILK]  27.03,92.3 0 top
JP309  M021X02_NO_SILK  [1X02_NO_SILK]  27.03,89.76 0 top
JP310  M021X02_NO_SILK  [1X02_NO_SILK]  27.03,87.22 0 top
JP311  M021X02_NO_SILK  [1X02_NO_SILK]  44.81,82.14 180 top
JP312  M021X02_NO_SILK  [1X02_NO_SILK]  39.73,82.14 180 top
JP313  M01NOSILK-KIT  [1X01NS-KIT]  72.86,52.56 0 top
JP314  M01NOSILK-KIT  [1X01NS-KIT]  72.86,62.72 0 top
JP315  M01NOSILK-KIT  [1X01NS-KIT]  72.86,60.18 0 top
JP316  M01NOSILK-KIT  [1X01NS-KIT]  72.86,57.64 0 top
JP317  M01NOSILK-KIT  [1X01NS-KIT]  72.86,65.26 0 top
JP318  M01NOSILK-KIT  [1X01NS-KIT]  57.11,70.34 0 top
JP319  M01NOSILK-KIT  [1X01NS-KIT]  57.11,67.8 0 top
JP320  M01NOSILK-KIT  [1X01NS-KIT]  57.11,65.26 0 top
JP321  M01NOSILK-KIT  [1X01NS-KIT]  57.11,62.72 0 top
JP322  M01NOSILK-KIT  [1X01NS-KIT]  72.86,67.8 0 top
JP323  M01NOSILK-KIT  [1X01NS-KIT]  67.78,50.02 0 top
JP324  M01NOSILK-KIT  [1X01NS-KIT]  72.86,55.1 0 top
JP325  M01NOSILK-KIT  [1X01NS-KIT]  52.03,60.18 90 top
JP326  M01NOSILK-KIT  [1X01NS-KIT]  54.57,60.18 90 top
JP327  M01NOSILK-KIT  [1X01NS-KIT]  59.65,60.18 90 top
JP328  M01NOSILK-KIT  [1X01NS-KIT]  57.11,60.18 90 top
JP329  M01NOSILK-KIT  [1X01NS-KIT]  57.62,50.02 0 top
JP330  M01NOSILK-KIT  [1X01NS-KIT]  55.08,50.02 0 top
JP331  M01NOSILK-KIT  [1X01NS-KIT]  60.16,50.02 0 top
JP332  M01NOSILK-KIT  [1X01NS-KIT]  72.86,50.02 0 top
JP333  M021X02_NO_SILK  [1X02_NO_SILK]  52.03,70.34 0 top
JP334  M021X02_NO_SILK  [1X02_NO_SILK]  52.03,67.8 0 top
JP335  M021X02_NO_SILK  [1X02_NO_SILK]  52.03,65.26 0 top
JP336  M021X02_NO_SILK  [1X02_NO_SILK]  52.03,62.72 0 top
JP337  M021X02_NO_SILK  [1X02_NO_SILK]  69.81,57.64 180 top
JP338  M021X02_NO_SILK  [1X02_NO_SILK]  64.73,57.64 180 top
JP339  M01NOSILK-KIT  [1X01NS-KIT]  97.86,52.56 0 top
JP340  M01NOSILK-KIT  [1X01NS-KIT]  97.86,62.72 0 top
JP341  M01NOSILK-KIT  [1X01NS-KIT]  97.86,60.18 0 top
JP342  M01NOSILK-KIT  [1X01NS-KIT]  97.86,57.64 0 top
JP343  M01NOSILK-KIT  [1X01NS-KIT]  97.86,65.26 0 top
JP344  M01NOSILK-KIT  [1X01NS-KIT]  82.11,70.34 0 top
JP345  M01NOSILK-KIT  [1X01NS-KIT]  82.11,67.8 0 top
JP346  M01NOSILK-KIT  [1X01NS-KIT]  82.11,65.26 0 top
JP347  M01NOSILK-KIT  [1X01NS-KIT]  82.11,62.72 0 top
JP348  M01NOSILK-KIT  [1X01NS-KIT]  97.86,67.8 0 top
JP349  M01NOSILK-KIT  [1X01NS-KIT]  92.78,50.02 0 top
JP350  M01NOSILK-KIT  [1X01NS-KIT]  97.86,55.1 0 top
JP351  M01NOSILK-KIT  [1X01NS-KIT]  77.03,60.18 90 top
JP352  M01NOSILK-KIT  [1X01NS-KIT]  79.57,60.18 90 top
JP353  M01NOSILK-KIT  [1X01NS-KIT]  84.65,60.18 90 top
JP354  M01NOSILK-KIT  [1X01NS-KIT]  82.11,60.18 90 top
JP355  M01NOSILK-KIT  [1X01NS-KIT]  82.62,50.02 0 top
JP356  M01NOSILK-KIT  [1X01NS-KIT]  80.08,50.02 0 top
JP357  M01NOSILK-KIT  [1X01NS-KIT]  85.16,50.02 0 top
JP358  M01NOSILK-KIT  [1X01NS-KIT]  97.86,50.02 0 top
JP359  M021X02_NO_SILK  [1X02_NO_SILK]  77.03,70.34 0 top
JP360  M021X02_NO_SILK  [1X02_NO_SILK]  77.03,67.8 0 top
JP361  M021X02_NO_SILK  [1X02_NO_SILK]  77.03,65.26 0 top
JP362  M021X02_NO_SILK  [1X02_NO_SILK]  77.03,62.72 0 top
JP363  M021X02_NO_SILK  [1X02_NO_SILK]  94.81,57.64 180 top
JP364  M021X02_NO_SILK  [1X02_NO_SILK]  89.73,57.64 180 top
JP365  M01NOSILK-KIT  [1X01NS-KIT]  72.86,77.06 0 top
JP366  M01NOSILK-KIT  [1X01NS-KIT]  72.86,87.22 0 top
JP367  M01NOSILK-KIT  [1X01NS-KIT]  72.86,84.68 0 top
JP368  M01NOSILK-KIT  [1X01NS-KIT]  72.86,82.14 0 top
JP369  M01NOSILK-KIT  [1X01NS-KIT]  72.86,89.76 0 top
JP370  M01NOSILK-KIT  [1X01NS-KIT]  57.11,94.84 0 top
JP371  M01NOSILK-KIT  [1X01NS-KIT]  57.11,92.3 0 top
JP372  M01NOSILK-KIT  [1X01NS-KIT]  57.11,89.76 0 top
JP373  M01NOSILK-KIT  [1X01NS-KIT]  57.11,87.22 0 top
JP374  M01NOSILK-KIT  [1X01NS-KIT]  72.86,92.3 0 top
JP375  M01NOSILK-KIT  [1X01NS-KIT]  67.78,74.52 0 top
JP376  M01NOSILK-KIT  [1X01NS-KIT]  72.86,79.6 0 top
JP377  M01NOSILK-KIT  [1X01NS-KIT]  52.03,84.68 90 top
JP378  M01NOSILK-KIT  [1X01NS-KIT]  54.57,84.68 90 top
JP379  M01NOSILK-KIT  [1X01NS-KIT]  59.65,84.68 90 top
JP380  M01NOSILK-KIT  [1X01NS-KIT]  57.11,84.68 90 top
JP381  M01NOSILK-KIT  [1X01NS-KIT]  57.62,74.52 0 top
JP382  M01NOSILK-KIT  [1X01NS-KIT]  55.08,74.52 0 top
JP383  M01NOSILK-KIT  [1X01NS-KIT]  60.16,74.52 0 top
JP384  M01NOSILK-KIT  [1X01NS-KIT]  72.86,74.52 0 top
JP385  M021X02_NO_SILK  [1X02_NO_SILK]  52.03,94.84 0 top
JP386  M021X02_NO_SILK  [1X02_NO_SILK]  52.03,92.3 0 top
JP387  M021X02_NO_SILK  [1X02_NO_SILK]  52.03,89.76 0 top
JP388  M021X02_NO_SILK  [1X02_NO_SILK]  52.03,87.22 0 top
JP389  M021X02_NO_SILK  [1X02_NO_SILK]  69.81,82.14 180 top
JP390  M021X02_NO_SILK  [1X02_NO_SILK]  64.73,82.14 180 top
JP391  M01NOSILK-KIT  [1X01NS-KIT]  97.86,77.06 0 top
JP392  M01NOSILK-KIT  [1X01NS-KIT]  97.86,87.22 0 top
JP393  M01NOSILK-KIT  [1X01NS-KIT]  97.86,84.68 0 top
JP394  M01NOSILK-KIT  [1X01NS-KIT]  97.86,82.14 0 top
JP395  M01NOSILK-KIT  [1X01NS-KIT]  97.86,89.76 0 top
JP396  M01NOSILK-KIT  [1X01NS-KIT]  82.11,94.84 0 top
JP397  M01NOSILK-KIT  [1X01NS-KIT]  82.11,92.3 0 top
JP398  M01NOSILK-KIT  [1X01NS-KIT]  82.11,89.76 0 top
JP399  M01NOSILK-KIT  [1X01NS-KIT]  82.11,87.22 0 top
JP400  M01NOSILK-KIT  [1X01NS-KIT]  97.86,92.3 0 top
JP401  M01NOSILK-KIT  [1X01NS-KIT]  92.78,74.52 0 top
JP402  M01NOSILK-KIT  [1X01NS-KIT]  97.86,79.6 0 top
JP403  M01NOSILK-KIT  [1X01NS-KIT]  77.03,84.68 90 top
JP404  M01NOSILK-KIT  [1X01NS-KIT]  79.57,84.68 90 top
JP405  M01NOSILK-KIT  [1X01NS-KIT]  84.65,84.68 90 top
JP406  M01NOSILK-KIT  [1X01NS-KIT]  82.11,84.68 90 top
JP407  M01NOSILK-KIT  [1X01NS-KIT]  82.62,74.52 0 top
JP408  M01NOSILK-KIT  [1X01NS-KIT]  80.08,74.52 0 top
JP409  M01NOSILK-KIT  [1X01NS-KIT]  85.16,74.52 0 top
JP410  M01NOSILK-KIT  [1X01NS-KIT]  97.86,74.52 0 top
JP411  M021X02_NO_SILK  [1X02_NO_SILK]  77.03,94.84 0 top
JP412  M021X02_NO_SILK  [1X02_NO_SILK]  77.03,92.3 0 top
JP413  M021X02_NO_SILK  [1X02_NO_SILK]  77.03,89.76 0 top
JP414  M021X02_NO_SILK  [1X02_NO_SILK]  77.03,87.22 0 top
JP415  M021X02_NO_SILK  [1X02_NO_SILK]  94.81,82.14 180 top
JP416  M021X02_NO_SILK  [1X02_NO_SILK]  89.73,82.14 180 top
LDO  MCP1703CB  [SOT23]  8.89,3.82 180 top
LDO1  MCP1703CB  [SOT23]  33.89,3.82 180 top
LDO2  MCP1703CB  [SOT23]  8.89,28.32 180 top
LDO3  MCP1703CB  [SOT23]  33.89,28.32 180 top
LDO4  MCP1703CB  [SOT23]  58.89,3.82 180 top
LDO5  MCP1703CB  [SOT23]  83.89,3.82 180 top
LDO6  MCP1703CB  [SOT23]  58.89,28.32 180 top
LDO7  MCP1703CB  [SOT23]  83.89,28.32 180 top
LDO8  MCP1703CB  [SOT23]  8.89,52.82 180 top
LDO9  MCP1703CB  [SOT23]  33.89,52.82 180 top
LDO10  MCP1703CB  [SOT23]  8.89,77.32 180 top
LDO11  MCP1703CB  [SOT23]  33.89,77.32 180 top
LDO12  MCP1703CB  [SOT23]  58.89,52.82 180 top
LDO13  MCP1703CB  [SOT23]  83.89,52.82 180 top
LDO14  MCP1703CB  [SOT23]  58.89,77.32 180 top
LDO15  MCP1703CB  [SOT23]  83.89,77.32 180 top
LOGO1  OSHW-LOGOS  [OSHW-LOGO-S]  39.73,14.46 0 top
LOGO2  OSHW-LOGOS  [OSHW-LOGO-S]  14.73,14.46 0 top
LOGO3  OSHW-LOGOS  [OSHW-LOGO-S]  14.73,38.96 0 top
LOGO4  OSHW-LOGOS  [OSHW-LOGO-S]  39.73,38.96 0 top
LOGO5  OSHW-LOGOS  [OSHW-LOGO-S]  64.73,14.46 0 top
LOGO6  OSHW-LOGOS  [OSHW-LOGO-S]  89.73,14.46 0 top
LOGO7  OSHW-LOGOS  [OSHW-LOGO-S]  64.73,38.96 0 top
LOGO8  OSHW-LOGOS  [OSHW-LOGO-S]  89.73,38.96 0 top
LOGO9  OSHW-LOGOS  [OSHW-LOGO-S]  14.73,63.46 0 top
LOGO10  OSHW-LOGOS  [OSHW-LOGO-S]  39.73,63.46 0 top
LOGO11  OSHW-LOGOS  [OSHW-LOGO-S]  14.73,87.96 0 top
LOGO12  OSHW-LOGOS  [OSHW-LOGO-S]  39.73,87.96 0 top
LOGO13  OSHW-LOGOS  [OSHW-LOGO-S]  64.73,63.46 0 top
LOGO14  OSHW-LOGOS  [OSHW-LOGO-S]  89.73,63.46 0 top
LOGO15  OSHW-LOGOS  [OSHW-LOGO-S]  64.73,87.96 0 top
LOGO16  OSHW-LOGOS  [OSHW-LOGO-S]  89.73,87.96 0 top
Q1  16MHz  [RESONATOR-SMD]  20.83,21.14 0 top
Q2  FET  [SOT323]  2.03,1.53 270 top
Q3  16MHz  [RESONATOR-SMD]  45.83,21.14 0 top
Q4  FET  [SOT323]  27.03,1.53 270 top
Q5  16MHz  [RESONATOR-SMD]  20.83,45.64 0 top
Q6  FET  [SOT323]  2.03,26.03 270 top
Q7  16MHz  [RESONATOR-SMD]  45.83,45.64 0 top
Q8  FET  [SOT323]  27.03,26.03 270 top
Q9  16MHz  [RESONATOR-SMD]  70.83,21.14 0 top
Q10  FET  [SOT323]  52.03,1.53 270 top
Q11  16MHz  [RESONATOR-SMD]  95.83,21.14 0 top
Q12  FET  [SOT323]  77.03,1.53 270 top
Q13  16MHz  [RESONATOR-SMD]  70.83,45.64 0 top
Q14  FET  [SOT323]  52.03,26.03 270 top
Q15  16MHz  [RESONATOR-SMD]  95.83,45.64 0 top
Q16  FET  [SOT323]  77.03,26.03 270 top
Q17  16MHz  [RESONATOR-SMD]  20.83,70.14 0 top
Q18  FET  [SOT323]  2.03,50.53 270 top
Q19  16MHz  [RESONATOR-SMD]  45.83,70.14 0 top
Q20  FET  [SOT323]  27.03,50.53 270 top
Q21  16MHz  [RESONATOR-SMD]  20.83,94.64 0 top
Q22  FET  [SOT323]  2.03,75.03 270 top
Q23  16MHz  [RESONATOR-SMD]  45.83,94.64 0 top
Q24  FET  [SOT323]  27.03,75.03 270 top
Q25  16MHz  [RESONATOR-SMD]  70.83,70.14 0 top
Q26  FET  [SOT323]  52.03,50.53 270 top
Q27  16MHz  [RESONATOR-SMD]  95.83,70.14 0 top
Q28  FET  [SOT323]  77.03,50.53 270 top
Q29  16MHz  [RESONATOR-SMD]  70.83,94.64 0 top
Q30  FET  [SOT323]  52.03,75.03 270 top
Q31  16MHz  [RESONATOR-SMD]  95.83,94.64 0 top
Q32  FET  [SOT323]  77.03,75.03 270 top
R1  1K  [0603-RES]  2.03,5.09 180 top
R2  10K  [0603-RES]  2.03,6.61 180 top
R3  Rp  [0603-RES]  17.02,3.82 270 top
R4  1K  [0603-RES]  21.08,3.82 90 top
R5  1M  [0603-RES]  2.03,3.56 180 top
R6  1K  [0603-RES]  19.05,3.82 270 top
R7  10K  [0603-RES]  27.03,6.61 180 top
R8  1K  [0603-RES]  27.03,5.09 180 top
R9  Rp  [0603-RES]  42.02,3.82 270 top
R10  1K  [0603-RES]  46.08,3.82 90 top
R11  1M  [0603-RES]  27.03,3.56 180 top
R12  1K  [0603-RES]  44.05,3.82 270 top
R13  10K  [0603-RES]  2.03,31.11 180 top
R14  1K  [0603-RES]  2.03,29.59 180 top
R15  Rp  [0603-RES]  17.02,28.32 270 top
R16  1K  [0603-RES]  21.08,28.32 90 top
R17  1M  [0603-RES]  2.03,28.06 180 top
R18  1K  [0603-RES]  19.05,28.32 270 top
R19  10K  [0603-RES]  27.03,31.11 180 top
R20  1K  [0603-RES]  27.03,29.59 180 top
R21  Rp  [0603-RES]  42.02,28.32 270 top
R22  1K  [0603-RES]  46.08,28.32 90 top
R23  1M  [0603-RES]  27.03,28.06 180 top
R24  1K  [0603-RES]  44.05,28.32 270 top
R25  10K  [0603-RES]  52.03,6.61 180 top
R26  1K  [0603-RES]  52.03,5.09 180 top
R27  Rp  [0603-RES]  67.02,3.82 270 top
R28  1K  [0603-RES]  71.08,3.82 90 top
R29  1M  [0603-RES]  52.03,3.56 180 top
R30  1K  [0603-RES]  69.05,3.82 270 top
R31  10K  [0603-RES]  77.03,6.61 180 top
R32  1K  [0603-RES]  77.03,5.09 180 top
R33  Rp  [0603-RES]  92.02,3.82 270 top
R34  1K  [0603-RES]  96.08,3.82 90 top
R35  1M  [0603-RES]  77.03,3.56 180 top
R36  1K  [0603-RES]  94.05,3.82 270 top
R37  10K  [0603-RES]  52.03,31.11 180 top
R38  1K  [0603-RES]  52.03,29.59 180 top
R39  Rp  [0603-RES]  67.02,28.32 270 top
R40  1K  [0603-RES]  71.08,28.32 90 top
R41  1M  [0603-RES]  52.03,28.06 180 top
R42  1K  [0603-RES]  69.05,28.32 270 top
R43  10K  [0603-RES]  77.03,31.11 180 top
R44  1K  [0603-RES]  77.03,29.59 180 top
R45  Rp  [0603-RES]  92.02,28.32 270 top
R46  1K  [0603-RES]  96.08,28.32 90 top
R47  1M  [0603-RES]  77.03,28.06 180 top
R48  1K  [0603-RES]  94.05,28.32 270 top
R49  10K  [0603-RES]  2.03,55.61 180 top
R50  1K  [0603-RES]  2.03,54.09 180 top
R51  Rp  [0603-RES]  17.02,52.82 270 top
R52  1K  [0603-RES]  21.08,52.82 90 top
R53  1M  [0603-RES]  2.03,52.56 180 top
R54  1K  [0603-RES]  19.05,52.82 270 top
R55  10K  [0603-RES]  27.03,55.61 180 top
R56  1K  [0603-RES]  27.03,54.09 180 top
R57  Rp  [0603-RES]  42.02,52.82 270 top
R58  1K  [0603-RES]  46.08,52.82 90 top
R59  1M  [0603-RES]  27.03,52.56 180 top
R60  1K  [0603-RES]  44.05,52.82 270 top
R61  10K  [0603-RES]  2.03,80.11 180 top
R62  1K  [0603-RES]  2.03,78.59 180 top
R63  Rp  [0603-RES]  17.02,77.32 270 top
R64  1K  [0603-RES]  21.08,77.32 90 top
R65  1M  [0603-RES]  2.03,77.06 180 top
R66  1K  [0603-RES]  19.05,77.32 270 top
R67  10K  [0603-RES]  27.03,80.11 180 top
R68  1K  [0603-RES]  27.03,78.59 180 top
R69  Rp  [0603-RES]  42.02,77.32 270 top
R70  1K  [0603-RES]  46.08,77.32 90 top
R71  1M  [0603-RES]  27.03,77.06 180 top
R72  1K  [0603-RES]  44.05,77.32 270 top
R73  10K  [0603-RES]  52.03,55.61 180 top
R74  1K  [0603-RES]  52.03,54.09 180 top
R75  Rp  [0603-RES]  67.02,52.82 270 top
R76  1K  [0603-RES]  71.08,52.82 90 top
R77  1M  [0603-RES]  52.03,52.56 180 top
R78  1K  [0603-RES]  69.05,52.82 270 top
R79  10K  [0603-RES]  77.03,55.61 180 top
R80  1K  [0603-RES]  77.03,54.09 180 top
R81  Rp  [0603-RES]  92.02,52.82 270 top
R82  1K  [0603-RES]  96.08,52.82 90 top
R83  1M  [0603-RES]  77.03,52.56 180 top
R84  1K  [0603-RES]  94.05,52.82 270 top
R85  10K  [0603-RES]  52.03,80.11 180 top
R86  1K  [0603-RES]  52.03,78.59 180 top
R87  Rp  [0603-RES]  67.02,77.32 270 top
R88  1K  [0603-RES]  71.08,77.32 90 top
R89  1M  [0603-RES]  52.03,77.06 180 top
R90  1K  [0603-RES]  69.05,77.32 270 top
R91  10K  [0603-RES]  77.03,80.11 180 top
R92  1K  [0603-RES]  77.03,78.59 180 top
R93  Rp  [0603-RES]  92.02,77.32 270 top
R94  1K  [0603-RES]  96.08,77.32 90 top
R95  1M  [0603-RES]  77.03,77.06 180 top
R96  1K  [0603-RES]  94.05,77.32 270 top
TP1  M01NOSILK-KIT  [1X01NS-KIT]  17.53,22.36 270 top
TP2  M01NOSILK-KIT  [1X01NS-KIT]  2.03,8.64 0 top
TP3  M01NOSILK-KIT  [1X01NS-KIT]  42.53,22.36 270 top
TP4  M01NOSILK-KIT  [1X01NS-KIT]  39.99,22.36 270 top
TP5  M01NOSILK-KIT  [1X01NS-KIT]  37.45,22.36 270 top
TP6  M01NOSILK-KIT  [1X01NS-KIT]  14.99,22.36 270 top
TP7  M01NOSILK-KIT  [1X01NS-KIT]  12.45,22.36 270 top
TP8  M01NOSILK-KIT  [1X01NS-KIT]  9.91,22.36 270 top
TP9  M01NOSILK-KIT  [1X01NS-KIT]  34.91,22.36 270 top
TP10  M01NOSILK-KIT  [1X01NS-KIT]  27.03,8.64 0 top
TP11  M01NOSILK-KIT  [1X01NS-KIT]  17.53,46.86 270 top
TP12  M01NOSILK-KIT  [1X01NS-KIT]  14.99,46.86 270 top
TP13  M01NOSILK-KIT  [1X01NS-KIT]  12.45,46.86 270 top
TP14  M01NOSILK-KIT  [1X01NS-KIT]  9.91,46.86 270 top
TP15  M01NOSILK-KIT  [1X01NS-KIT]  2.03,33.14 0 top
TP16  M01NOSILK-KIT  [1X01NS-KIT]  42.53,46.86 270 top
TP17  M01NOSILK-KIT  [1X01NS-KIT]  39.99,46.86 270 top
TP18  M01NOSILK-KIT  [1X01NS-KIT]  37.45,46.86 270 top
TP19  M01NOSILK-KIT  [1X01NS-KIT]  34.91,46.86 270 top
TP20  M01NOSILK-KIT  [1X01NS-KIT]  27.03,33.14 0 top
TP21  M01NOSILK-KIT  [1X01NS-KIT]  67.53,22.36 270 top
TP22  M01NOSILK-KIT  [1X01NS-KIT]  64.99,22.36 270 top
TP23  M01NOSILK-KIT  [1X01NS-KIT]  62.45,22.36 270 top
TP24  M01NOSILK-KIT  [1X01NS-KIT]  59.91,22.36 270 top
TP25  M01NOSILK-KIT  [1X01NS-KIT]  52.03,8.64 0 top
TP26  M01NOSILK-KIT  [1X01NS-KIT]  92.53,22.36 270 top
TP27  M01NOSILK-KIT  [1X01NS-KIT]  89.99,22.36 270 top
TP28  M01NOSILK-KIT  [1X01NS-KIT]  87.45,22.36 270 top
TP29  M01NOSILK-KIT  [1X01NS-KIT]  84.91,22.36 270 top
TP30  M01NOSILK-KIT  [1X01NS-KIT]  77.03,8.64 0 top
TP31  M01NOSILK-KIT  [1X01NS-KIT]  67.53,46.86 270 top
TP32  M01NOSILK-KIT  [1X01NS-KIT]  64.99,46.86 270 top
TP33  M01NOSILK-KIT  [1X01NS-KIT]  62.45,46.86 270 top
TP34  M01NOSILK-KIT  [1X01NS-KIT]  59.91,46.86 270 top
TP35  M01NOSILK-KIT  [1X01NS-KIT]  52.03,33.14 0 top
TP36  M01NOSILK-KIT  [1X01NS-KIT]  92.53,46.86 270 top
TP37  M01NOSILK-KIT  [1X01NS-KIT]  89.99,46.86 270 top
TP38  M01NOSILK-KIT  [1X01NS-KIT]  87.45,46.86 270 top
TP39  M01NOSILK-KIT  [1X01NS-KIT]  84.91,46.86 270 top
TP40  M01NOSILK-KIT  [1X01NS-KIT]  77.03,33.14 0 top
TP41  M01NOSILK-KIT  [1X01NS-KIT]  17.53,71.36 270 top
TP42  M01NOSILK-KIT  [1X01NS-KIT]  14.99,71.36 270 top
TP43  M01NOSILK-KIT  [1X01NS-KIT]  12.45,71.36 270 top
TP44  M01NOSILK-KIT  [1X01NS-KIT]  9.91,71.36 270 top
TP45  M01NOSILK-KIT  [1X01NS-KIT]  2.03,57.64 0 top
TP46  M01NOSILK-KIT  [1X01NS-KIT]  42.53,71.36 270 top
TP47  M01NOSILK-KIT  [1X01NS-KIT]  39.99,71.36 270 top
TP48  M01NOSILK-KIT  [1X01NS-KIT]  37.45,71.36 270 top
TP49  M01NOSILK-KIT  [1X01NS-KIT]  34.91,71.36 270 top
TP50  M01NOSILK-KIT  [1X01NS-KIT]  27.03,57.64 0 top
TP51  M01NOSILK-KIT  [1X01NS-KIT]  17.53,95.86 270 top
TP52  M01NOSILK-KIT  [1X01NS-KIT]  14.99,95.86 270 top
TP53  M01NOSILK-KIT  [1X01NS-KIT]  12.45,95.86 270 top
TP54  M01NOSILK-KIT  [1X01NS-KIT]  9.91,95.86 270 top
TP55  M01NOSILK-KIT  [1X01NS-KIT]  2.03,82.14 0 top
TP56  M01NOSILK-KIT  [1X01NS-KIT]  42.53,95.86 270 top
TP57  M01NOSILK-KIT  [1X01NS-KIT]  39.99,95.86 270 top
TP58  M01NOSILK-KIT  [1X01NS-KIT]  37.45,95.86 270 top
TP59  M01NOSILK-KIT  [1X01NS-KIT]  34.91,95.86 270 top
TP60  M01NOSILK-KIT  [1X01NS-KIT]  27.03,82.14 0 top
TP61  M01NOSILK-KIT  [1X01NS-KIT]  67.53,71.36 270 top
TP62  M01NOSILK-KIT  [1X01NS-KIT]  64.99,71.36 270 top
TP63  M01NOSILK-KIT  [1X01NS-KIT]  62.45,71.36 270 top
TP64  M01NOSILK-KIT  [1X01NS-KIT]  59.91,71.36 270 top
TP65  M01NOSILK-KIT  [1X01NS-KIT]  52.03,57.64 0 top
TP66  M01NOSILK-KIT  [1X01NS-KIT]  92.53,71.36 270 top
TP67  M01NOSILK-KIT  [1X01NS-KIT]  89.99,71.36 270 top
TP68  M01NOSILK-KIT  [1X01NS-KIT]  87.45,71.36 270 top
TP69  M01NOSILK-KIT  [1X01NS-KIT]  84.91,71.36 270 top
TP70  M01NOSILK-KIT  [1X01NS-KIT]  77.03,57.64 0 top
TP71  M01NOSILK-KIT  [1X01NS-KIT]  67.53,95.86 270 top
TP72  M01NOSILK-KIT  [1X01NS-KIT]  64.99,95.86 270 top
TP73  M01NOSILK-KIT  [1X01NS-KIT]  62.45,95.86 270 top
TP74  M01NOSILK-KIT  [1X01NS-KIT]  59.91,95.86 270 top
TP75  M01NOSILK-KIT  [1X01NS-KIT]  52.03,82.14 0 top
TP76  M01NOSILK-KIT  [1X01NS-KIT]  92.53,95.86 270 top
TP77  M01NOSILK-KIT  [1X01NS-KIT]  89.99,95.86 270 top
TP78  M01NOSILK-KIT  [1X01NS-KIT]  87.45,95.86 270 top
TP79  M01NOSILK-KIT  [1X01NS-KIT]  84.91,95.86 270 top
TP80  M01NOSILK-KIT  [1X01NS-KIT]  77.03,82.14 0 top
U1  MCP73831  [SOT23-5]  39.22,3.56 180 top
U2  MCP73831  [SOT23-5]  14.22,3.56 180 top
U3  MCP73831  [SOT23-5]  14.22,28.06 180 top
U4  MCP73831  [SOT23-5]  39.22,28.06 180 top
U5  MCP73831  [SOT23-5]  64.22,3.56 180 top
U6  MCP73831  [SOT23-5]  89.22,3.56 180 top
U7  MCP73831  [SOT23-5]  64.22,28.06 180 top
U8  MCP73831  [SOT23-5]  89.22,28.06 180 top
U9  MCP73831  [SOT23-5]  14.22,52.56 180 top
U10  MCP73831  [SOT23-5]  39.22,52.56 180 top
U11  MCP73831  [SOT23-5]  14.22,77.06 180 top
U12  MCP73831  [SOT23-5]  39.22,77.06 180 top
U13  MCP73831  [SOT23-5]  64.22,52.56 180 top
U14  MCP73831  [SOT23-5]  89.22,52.56 180 top
U15  MCP73831  [SOT23-5]  64.22,77.06 180 top
U16  MCP73831  [SOT23-5]  89.22,77.06 180 top

## Library data of the parts
AVR AVR1-AVR15 = SparkFun-DigitalIC; PROD_ID: IC-09069
C1-C3 C7-C10 C12 C15-C17 C19 C22-C24 C26 C29-C31 C33 C36-C38 C40 C43-C45 C47 C50-C52 C54 C57-C59 C61 C64-C66 C68 C71-C73 C75 C78-C80 C82 C85-C87 C89 C92-C94 C96 C99-C101 C103 C106-C108 C110 D1-D16 Q1 Q3 Q5 Q7 Q9 Q11 Q13 Q15 Q17 Q19 Q21 Q23 Q25 Q27 Q29 Q31 U1-U16 = SparkFun
C4-C6 C11 C13 C14 C18 C20 C21 C25 C27 C28 C32 C34 C35 C39 C41 C42 C46 C48 C49 C53 C55 C56 C60 C62 C63 C67 C69 C70 C74 C76 C77 C81 C83 C84 C88 C90 C91 C95 C97 C98 C102 C104 C105 C109 C111 C112 = SparkFun-Capacitors; PROD_ID: CAP-08280
JP1-JP416 TP1-TP80 = SparkFun-Connectors
LDO LDO1-LDO15 = linear
LOGO1-LOGO16 = SparkFun-Aesthetics
Q2 Q4 Q6 Q8 Q10 Q12 Q14 Q16 Q18 Q20 Q22 Q24 Q26 Q28 Q30 Q32 = SparkFun-DiscreteSemi; PROD_ID: TRANS-11151
R1-R96 = SparkFun-Resistors